# Altium PCB NRV-AOU34.PCBDOC
Units mil, origin at the board's own origin, x right, y up, seen from the top; angles counter-clockwise.
Board outline 6800 x 3400 mil, 2 copper layers (Top Layer, Bottom Layer), stack 61.8 mil thick; 27 components, 31 nets, 301 pads, 79 vias.
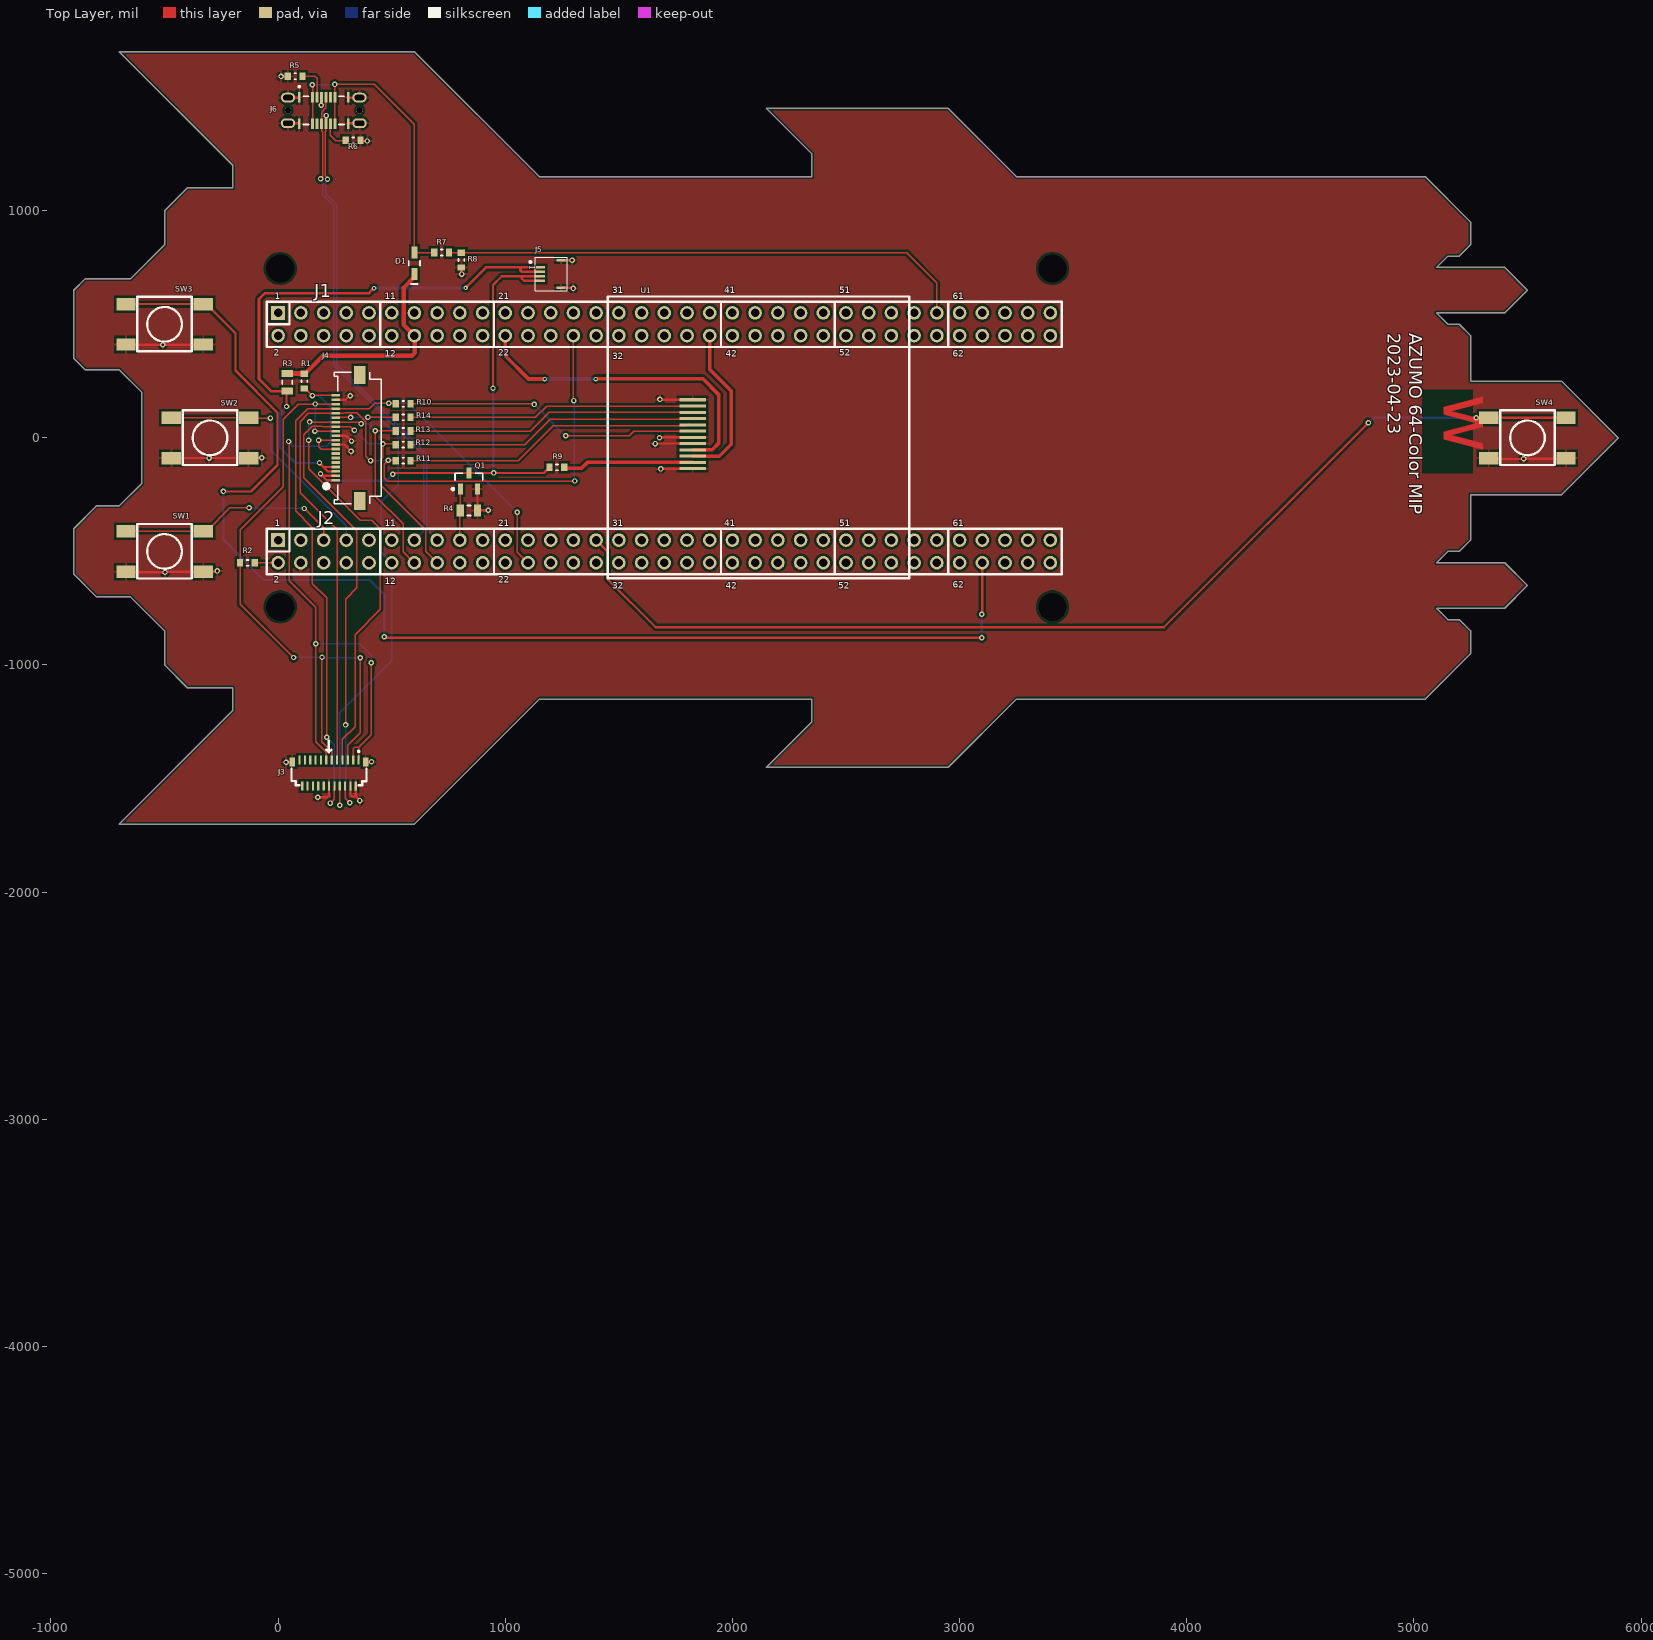
[diagram p0: Top Layer view]
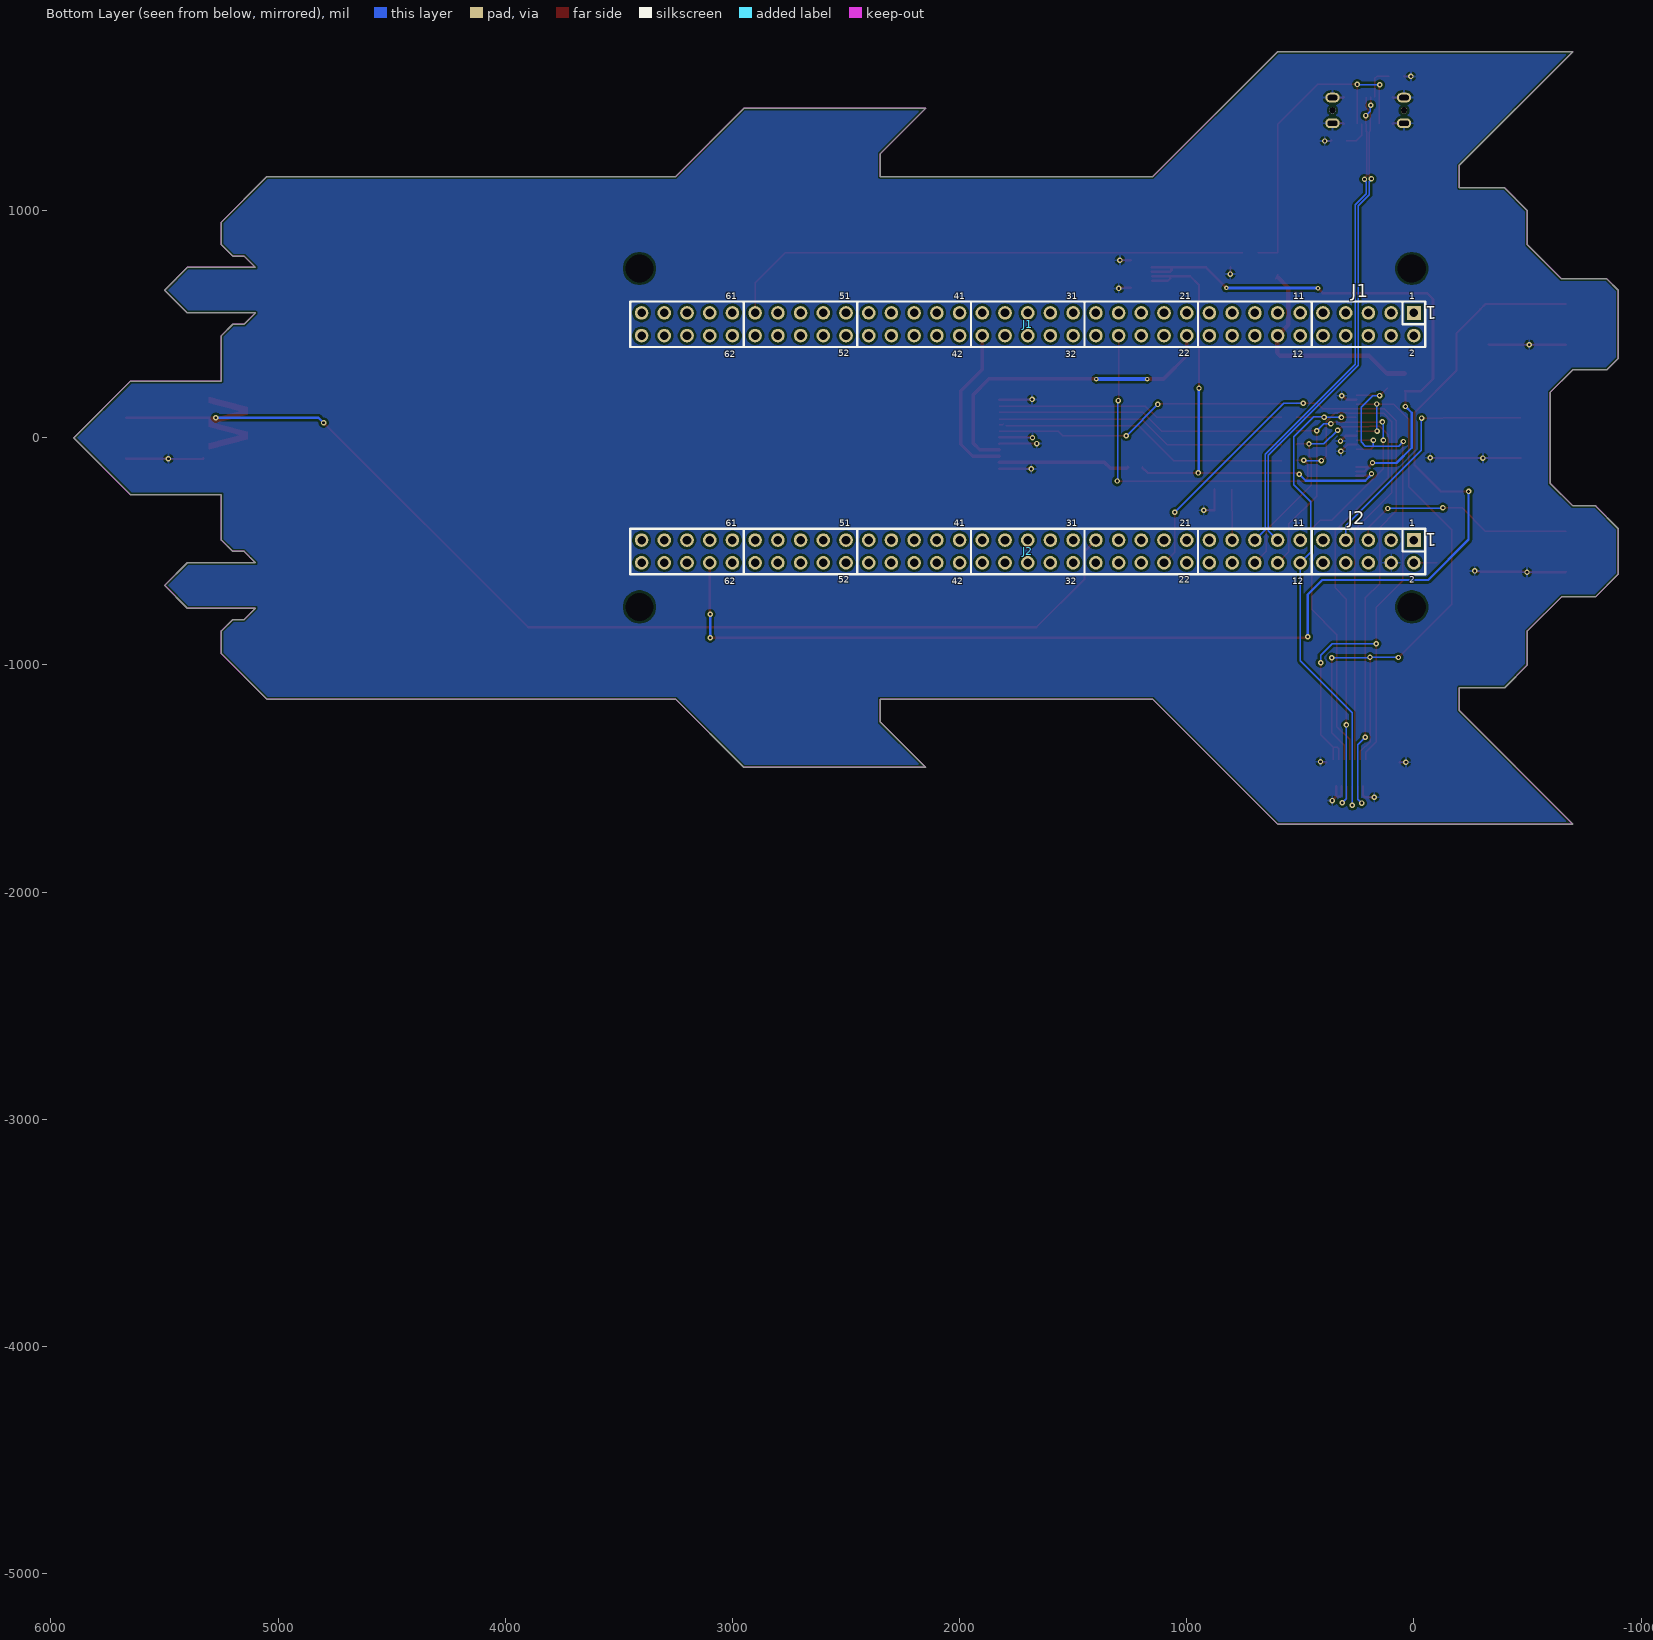
[diagram p1: Bottom Layer view, seen from below]
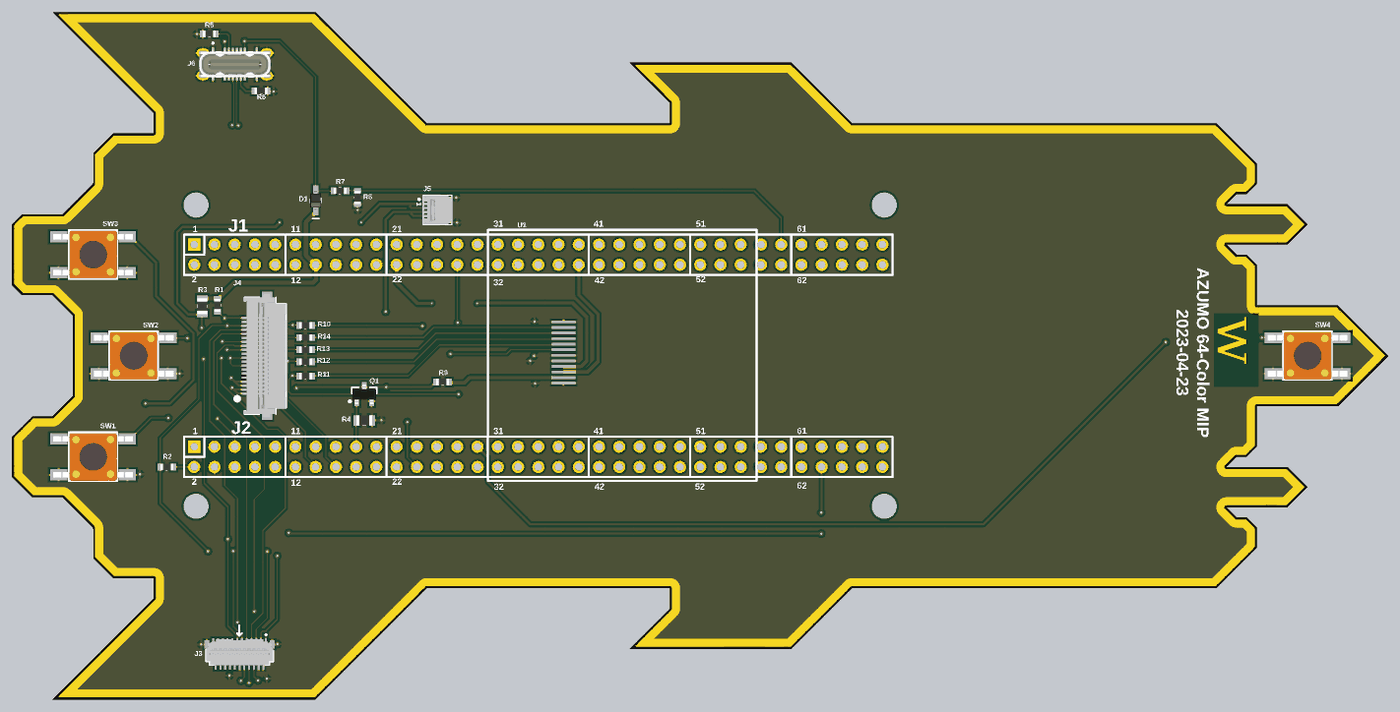
[diagram p2: 3D render of the assembled board from above, using the file's embedded part models]

## Layer stack, top to bottom
Top Solder: solder mask 0.4, Solder Resist, Dk 3.5
Top Layer: signal copper 1.4
Dielectric 3: core 59, Core-042, Dk 4.6
Bottom Layer: signal copper 1.4
Bottom Solder: solder mask 0.4, Solder Resist, Dk 3.5

## Board outline
-900,-600 -800,-700 -650,-700 -500,-850 -500,-1000 -400,-1100 -200,-1100 -200,-1200 -700,-1700 600,-1700 1150,-1150 2350,-1150 2350,-1250 2150,-1450 2950,-1450 3250,-1150 5050,-1150 5250,-950 5250,-850 5200,-800 5150,-800 5100,-750 5400,-750 5500,-650 5400,-550 5100,-550 5150,-500 5200,-500 5250,-450 5250,-250 5650,-250 5900,0 5650,250 5250,250 5250,450 5200,500 5150,500 5100,550 5400,550 5500,650 5400,750 5100,750 5150,800 5200,800 5250,850 5250,950 5050,1150 3250,1150 2950,1450 2150,1450 2350,1250 2350,1150 1150,1150 600,1700 -700,1700 -200,1200 -200,1100 -400,1100 -500,1000 -500,850 -650,700 -850,700 -900,650 -900,350 -850,300 -700,300 -600,200 -600,-200 -700,-300 -800,-300 -900,-400

## Design rules (kind name [scope] priority, off if disabled: settings)
Clearance [All] p1: gap=6 ignorepadtopadclearanceinfootprint=TRUE except(10: Arc-Poly Track-Poly SMDPad-Poly THPad-Poly Via-Poly Fill-Poly Poly-Poly)
ComponentClearance [All] p1: gap=0 collisioncheckmode=3 verticalgap=0 showdistances=FALSE
DiffPairsRouting [All] p1: maxlimit=6 minlimit=6 mostfreqgap=6 toplayer_minwidth=7 toplayer_maxwidth=7 toplayer_prefwidth=7 bottomlayer_minwidth=7 bottomlayer_maxwidth=7 bottomlayer_prefwidth=7 maxuncoupledlength=500
FabricationTestPointUsage TestPointUsage [All] p1: valid=0 allowmultiple=FALSE
FabricationTestpoint Testpoint [All] p1: side=3 testpointundercomponent=TRUE minsize=40 maxsize=100 preferedsize=60 minholesize=0 maxholesize=40 preferedholesize=32 testpointgrid=1 allowsidetop=TRUE allowsidebottom=TRUE usegrid=TRUE gridtolerance=0.01
HoleSize [All] p1: absolutevalues=TRUE maxlimit=500 minlimit=6 maxpercent=80.000 minpercent=20.000
HoleToHoleClearance [All] p1: gap=0 allowstackedmicrovias=TRUE
MinimumSolderMaskSliver [All] p1: minsoldermaskwidth=0
PlaneClearance [All] p1: clearance=12
PlaneConnect [All] p1: planeconnectstyle=Direct reliefexpansion=12 reliefentries=4 reliefconductorwidth=6 reliefairgap=6
PolygonConnect PolygonConnect_ThermalPad [HoleSize = 18;] p1: connectstyle=Direct reliefconductorwidth=10 reliefentries=4 polygonreliefangle="90 Angle" airgapwidth=10
PolygonConnect [All] p2: connectstyle=Relief reliefconductorwidth=10 reliefentries=4 polygonreliefangle="90 Angle" airgapwidth=10
RoutingVias [All] p1: holewidth=10 width=20 viastyle="Through Hole" minholewidth=6 minwidth=12 maxholewidth=20 maxwidth=50
ShortCircuit ShortCircuit_1 [HasFootprint('4-40 X 250') vs HasFootprint('4-40 X 250')] p1: allowed=TRUE
ShortCircuit [All] p2: allowed=FALSE
SilkToSilkClearance [All] p1: silktosilkclearance=0
SilkToSolderMaskClearance SilkscreenOverComponentPads [IsPad] p1: minsilkscreentomaskgap=1 clearancetoexposedcopper=TRUE
SolderMaskExpansion [All] p1: expansion=2.5 istentingtop=FALSE
Width [All] p1: maxlimit=200 minlimit=5 preferedwidth=6
18 further rules are at their usual default settings.

## Classes and differential pairs
pad class "New Class": U24-25

## Components (designator, comment, footprint, x,y, rotation, side; value= is the part's Value field where it differs from the comment)
D1 "BAT760-7" D_SOD-323_P 600,768 r270 top
J1 "HDR_2x35" "HEADER 2X35 .100\"" 0,550 r0 bottom
J2 "HDR_2x35" "HEADER 2X35 .100\"" 0,-450 r0 bottom
J3 "=Value" FH26W-23S-0.3SHW(60) 224,-1479 r180 top
J4 "505110-2091" CON_5051102091_MOL 350,0 r90 top
J5 "503480-0400" 5034800400 1199,721 r90 top
J6 "USB4145-03-0230-C" GCT_USB4145-03-0230-C_REVA2 200.79,1441.54 r0 top
Q1 "FDV305N" SOT-23 840,-190 r90 top
R1 "0" R0603_0.55MM_MD 115,250 r270 top value=1k
R2 "0" R0603_0.55MM_MD -135,-550 r180 top value=1k
R3 "100" R0805_0.65MM_MD 40,245 r90 top value=1k
R4 "100k" R0805_0.65MM_MD 840,-320 r0 top value=1k
R5 "5.1k" R0603_0.55MM_MD 75,1592 r180 top
R6 "5.1k" R0603_0.55MM_MD 330,1310 r0 top
R7 "5.1k" R0603_0.55MM_MD 720,816 r0 top
R8 "10k" R0603_0.55MM_MD 807,783 r90 top
R9 "33" R0603_0.55MM_MD 1227.52,-130 r0 top
R10 "0" R0603_0.55MM_MD 550,150 r0 top value=1k
R11 "0" R0603_0.55MM_MD 550,-100 r0 top value=1k
R12 "0" R0603_0.55MM_MD 550,-30 r0 top value=1k
R13 "0" R0603_0.55MM_MD 550,30 r0 top value=1k
R14 "0" R0603_0.55MM_MD 550,90 r0 top value=1k
SW1 "FSM4JSMATR" FSM4JSMA -500,-500 r90 top
SW2 "FSM4JSMATR" FSM4JSMA -300,0 r90 top
SW3 "FSM4JSMATR" FSM4JSMA -500,500 r90 top
SW4 "FSM4JSMATR" FSM4JSMA 5500,0 r90 top
U1 "ER-TFT1.54-1" ER-TFT1.54-1 1825,15.98 r270 top

## Footprints (in the part's own frame and the unit in brackets; to place one, negate y for a bottom-side part, rotate by r counter-clockwise, add the part's x,y. Pads: shape width x height; smd on the part's side, far side on the other; paste and mask are expansions set on the pad)
5034800400 [mm] "CONN FFC FPC 4POS 0.50MM R/A"
  rect 0.3x1.1 smd: 1(0.75,1.175) 2(0.25,1.175) 3(-0.25,1.175) 4(-0.75,1.175)
  rect 0.3x1 smd: M1(-1.54,-1.175) M2(1.54,-1.175)
  silkscreen extent -1.88,-1.88 1.88,2.37, body extent -1.85,-1.88 1.85,1.72, height 1.88
CON_5051102091_MOL [mm]
  rect 0.3x1 smd paste+0 mask+0.076: 1(-4.75,2.45) 2(-4.25,2.45) 3(-3.75,2.45) 4(-3.25,2.45) 5(-2.75,2.45) 6(-2.25,2.45) 7(-1.75,2.45) 8(-1.25,2.45) 9(-0.75,2.45) 10(-0.25,2.45) 11(0.25,2.45) 12(0.75,2.45) 13(1.25,2.45) 14(1.75,2.45) 15(2.25,2.45) 16(2.75,2.45) 17(3.25,2.45) 18(3.75,2.45) 19(4.25,2.45) 20(4.75,2.45)
  rect 2x1.3 smd paste+0 mask+0.076: P1(-7.05,-0.25) P2(7.05,-0.25)
  silkscreen extent -7.35,-2.65 7.35,3.72, body extent -7.75,-2.6 7.75,2.7, height 1.88
D_SOD-323_P [mm] "SOD-123 Diode - Polarized"
  rect 1.35x0.7 smd: 1(-1.2,0) 2(1.2,0)
  silkscreen extent -0.25,-0.64 2.29,0.64, body extent -1.3,-0.68 1.3,0.67, height 1.1
ER-TFT1.54-1 [mm]
  rect 0.35x3 smd: 1(3.85,0) 2(3.15,0) 3(2.45,0) 4(1.75,0) 5(1.05,0) 6(0.35,0) 7(-0.35,0) 8(-1.05,0) 9(-1.75,0) 10(-2.45,0) 11(-3.15,0) 12(-3.85,0)
  silkscreen extent -15.41,-9.5 16.11,24.22, body extent -15.54,-9.63 16.24,24.35, height 2.1
FH26W-23S-0.3SHW(60) [mm] "23 Position FPC Connector Contacts, Bottom 0.012\" (0.30mm) Surface Mount, Right Angle"
  rect 0.25x1 smd: 1(-3.3,-1.565) 2(-3,1.365) 3(-2.7,-1.565) 4(-2.4,1.365) 5(-2.1,-1.565) 6(-1.8,1.365) 7(-1.5,-1.565) 8(-1.2,1.365) 9(-0.9,-1.565) 10(-0.6,1.365) 11(-0.3,-1.565) 12(0,1.365) 13(0.3,-1.565) 14(0.6,1.365) 15(0.9,-1.565) 16(1.2,1.365) 17(1.5,-1.565) 18(1.8,1.365) 19(2.1,-1.565) 20(2.4,1.365) 21(2.7,-1.565) 22(3,1.365) 23(3.3,-1.565)
  rect 0.6x1 smd: MP1(-4.1,-1.3) MP2(4.1,-1.3)
  silkscreen extent -4.2,-3.7 4.2,1.28, body extent -4.2,-1.95 4.2,1.55, height 1
FSM4JSMA [mil] "SWITCH TACTILE SPST-NO 0.05A 12V"
  rect 55x85 smd: A(-89,170) A(-89,-170) B(89,170) B(89,-170)
  silkscreen extent -119,-120 121,120, body extent -118,-198 118,196, height 200
GCT_USB4145-03-0230-C_REVA2 [mm]
  rect 0.3x1.15 smd: A1(-2.75,1.485) A4(-1.25,1.485) A5(-0.75,1.485) A6(-0.25,1.485) A7(0.25,1.485) A8(0.75,1.485) A9(1.25,1.485) A12(2.75,1.485) B1(2.75,-1.485) B4(1.25,-1.485) B5(0.75,-1.485) B6(0.25,-1.485) B7(-0.25,-1.485) B8(-0.75,-1.485) B9(-1.25,-1.485) B12(-2.75,-1.485)
  oval 1.6x1.1 hole 0.6 slot 1.1 at 0 deg: S1(-4,1.43) S2(4,1.43) S3(-4,-1.43) S4(4,-1.43)
  round 0.71 hole 0.71 unplated: ""(-4,0) ""(4,0)
  silkscreen extent -2.85,-1.58 2.28,2.76, body extent -4.48,-1.86 4.47,1.83, height 7.46
"HEADER 2X35 .100\"" [mil]
  rect 62x62 hole 38: 1(0,0)
  round 60 hole 38: 2(0,100) 3(100,0) 4(100,100) 5(200,0) 6(200,100) 7(300,0) 8(300,100) 9(400,0) 10(400,100) 11(500,0) 12(500,100) 13(600,0) 14(600,100) 15(700,0) 16(700,100) 17(800,0) 18(800,100) 19(900,0) 20(900,100) 21(1000,0) 22(1000,100) 23(1100,0) 24(1100,100) 25(1200,0) 26(1200,100) 27(1300,0) 28(1300,100) 29(1400,0) 30(1400,100) 31(1500,0) 32(1500,100) 33(1600,0) 34(1600,100) 35(1700,0) 36(1700,100) 37(1800,0) 38(1800,100) 39(1900,0) 40(1900,100) 41(2000,0) 42(2000,100) 43(2100,0) 44(2100,100) 45(2200,0) 46(2200,100) 47(2300,0) 48(2300,100) 49(2400,0) 50(2400,100) 51(2500,0) 52(2500,100) 53(2600,0) 54(2600,100) 55(2700,0) 56(2700,100) 57(2800,0) 58(2800,100) 59(2900,0) 60(2900,100) 61(3000,0) 62(3000,100) 63(3100,0) 64(3100,100) 65(3200,0) 66(3200,100) 67(3300,0) 68(3300,100) 69(3400,0) 70(3400,100)
  silkscreen extent -50,-50 3450,150
R0603_0.55MM_MD [mm] "Resistor 0603 Medium Density"
  rect 0.7x0.85 smd: 1(-0.825,0) 2(0.825,0)
  silkscreen extent -0.1,-0.33 0.1,0.33, body extent -0.8,-0.4 0.8,0.4, height 0.55
R0805_0.65MM_MD [mm] "Resistor 0805 Medium Density"
  rect 0.8x1.3 smd: 1(-0.975,0) 2(0.975,0)
  silkscreen extent -0.2,-0.55 0.2,0.55, body extent -1,-0.63 1,0.63, height 0.65
SOT-23 [mm] "SOT-23"
  rect 1.2x0.6 smd: 1(-0.9,0.95) 2(-0.9,-0.95) 3(0.9,0)
  silkscreen extent -1.02,-1.55 0.87,1.92, body extent -1.27,-1.5 1.23,1.5, height 1.07

## Part data
D1: "DIODE SCHOTTKY 30V 1A SOD323", Capacitance @ Vr- F="25pF @ 5V- 1MHz", Current - Average Rectified (Io)=1A, Current - Reverse Leakage @ Vr="50µA @ 15V", Manufacturer="Diodes Inc", Package="SC-76- SOD-323", Supplier Device Package=SOD-323, Supplier Part Number 1=BAT760DICT-ND, Voltage - DC Reverse (Vr) (Max)=30V, Voltage - Forward (Vf) (Max) @ If="550mV @ 1A", Category=Diodes, CategorySort=400, ComponentLink1Description="Internal Datasheet", ComponentLink1URL=http://www.diodes.com/datasheets/ds30498.pdf, ComponentLink2Description="External Datasheet", ComponentLink2URL=http://www.diodes.com/datasheets/ds30498.pdf, Diode Suffix=1A_2C, Diode Type=Schottky, Manufacturer Part Number=BAT760-7, Mounting Type="Surface Mount", Num Pins=2, Packaging="Cut Tape (CT)", Reverse Recovery Time (trr)=-, SortValue=BAT760-7, Speed="Fast Recovery =< 500ns- > 200mA (Io)", Supplier 1=Digi-Key
J1 J2: "2x35 Header .100\"", Supplier Part Number 1=1849-PR20204VBDN-ND, Pricing="1=0.16000, 10=0.15400, 100=0.09510, 500=0.07872, 1000=0.06888, 5000=0.05904, 10000=0.05740 (USD)", RoHS=No, Stock=3387, Supplier 1=Digi-Key
J3: library part FH26W-23S-0.3SHW(60), Manufacturer=Hirose, Manufacturer Part Number=FH26W-23S-0.3SHW(60)
J4: "Conn, Rect, Rt. Angle, FFC/FPC, 0.50MM Pitch, 20 Circuit, Bottom Contact, ZIF", Actuator Color=Black, Current Rating=500mA, Flammability Rating="UL94 V-0", Housing Color=Beige, Manufacturer=Molex, Max Operating Temperature=105°C, Min Operating Temperature=-40°C, Supplier Part Number 1=538-505110-2091, Voltage Rating=50V, Actuator Material=Nylon,Glass,Polyamide, Category="FFC / FPC", ComponentLink1Description=http://www.farnell.com/datasheets/2790613.pdf?src-supplier=Farnell, ComponentLink1URL=http://www.farnell.com/datasheets/2790613.pdf?src-supplier=Farnell, ComponentLink2Description=https://media.digikey.com/pdf/Data%20Sheets/Molex%20PDFs/FFC-FPC_Connectors.pdf?src-supplier=Digi-Key, ComponentLink2URL=https://media.digikey.com/pdf/Data%20Sheets/Molex%20PDFs/FFC-FPC_Connectors.pdf?src-supplier=Digi-Key, ComponentLink3Description=http://www.alliedelec.com/images/products/datasheets/bm/MOLEX/70606838.pdf?src-supplier=Allied+Electronics, ComponentLink3URL=http://www.alliedelec.com/images/products/datasheets/bm/MOLEX/70606838.pdf?src-supplier=Allied+Electronics, ComponentLink4Description=http://www.molex.com/pdm_docs/sd/5051102091_sd.pdf?src-supplier=Avnet, ComponentLink4URL=http://www.molex.com/pdm_docs/sd/5051102091_sd.pdf?src-supplier=Avnet, ComponentLink5Description=http://www.farnell.com/datasheets/2790613.pdf?src-supplier=Element14, ComponentLink5URL=http://www.farnell.com/datasheets/2790613.pdf?src-supplier=Element14, ComponentLink6Description=http://www.farnell.com/datasheets/2790613.pdf?src-supplier=Newark, ComponentLink6URL=http://www.farnell.com/datasheets/2790613.pdf?src-supplier=Newark, Contact Material=Bronze, Contact Plating=Gold, Gender=Receptacle, Halogen Free="Low Halogen", Height=1.9mm, Housing Material=Polymer, Manufacturer Part Number=505110-2091, Mating Cycles=25, Mounting Technology="Surface Mount", Number of Circuits=20, Number of Contacts=20, Number of Positions=20, Number of Rows=1, Orientation="Right Angle", Packaging="Cut Tape", Pins=20, Pitch=0.5mm, Pricing="1=0.95000, 10=0.78000, 50=0.78000, 100=0.65000, 500=0.58500, 1000=0.52000, 3000=0.47100, 6000=0.43200, 9000=0.42200, 10000=0.42200, 24000=0.40600 (USD)", Reach SVHC Compliant=Unknown, RoHS=Yes, Series="Easy-On 505110", Stock 1=37659, Supplier 1=Mouser, Termination=Solder
J5: "CONN FFC FPC 4POS 0.50MM R/A", Current Rating=500mA, Flammability Rating="UL94 V-0", Housing Color=White, Manufacturer=Molex, Max Operating Temperature=85°C, Max Voltage Rating (AC)=50V, Min Operating Temperature=-40°C, Package Quantity=1, Supplier Part Number 1=WM1386CT-ND, Actuator Material=Nylon,Glass,Polyamide, ComponentLink1Description=https://datasheet.ciiva.com/671/5034800400-sd-671136.pdf?src-supplier=Digi-Key, ComponentLink1URL=https://datasheet.ciiva.com/671/5034800400-sd-671136.pdf?src-supplier=Digi-Key, ComponentLink2Description=https://datasheet.ciiva.com/15249/392825034800400-ffc-fpc-nectors-15249120.pdf?src-supplier=Arrow+Europe, ComponentLink2URL=https://datasheet.ciiva.com/15249/392825034800400-ffc-fpc-nectors-15249120.pdf?src-supplier=Arrow+Europe, ComponentLink3Description=https://datasheet.ciiva.com/16658/5034800400-ffc-fpc-connectors-16658883.pdf?src-supplier=Avnet+Europe, ComponentLink3URL=https://datasheet.ciiva.com/16658/5034800400-ffc-fpc-connectors-16658883.pdf?src-supplier=Avnet+Europe, ComponentLink4Description=https://datasheet.ciiva.com/3926/135095034800400-ffc-fpc-nectors-3926214.pdf?src-supplier=Arrow, ComponentLink4URL=https://datasheet.ciiva.com/3926/135095034800400-ffc-fpc-nectors-3926214.pdf?src-supplier=Arrow, ComponentLink5Description=https://datasheet.ciiva.com/5137/5034800400-ffc-fpc-connectors-179546-5137607.pdf?src-supplier=Mouser, ComponentLink5URL=https://datasheet.ciiva.com/5137/5034800400-ffc-fpc-connectors-179546-5137607.pdf?src-supplier=Mouser, ComponentLink6Description=https://datasheet.ciiva.com/671/5034800400-sd-671137.pdf?src-supplier=Digi-Key, ComponentLink6URL=https://datasheet.ciiva.com/671/5034800400-sd-671137.pdf?src-supplier=Digi-Key, ComponentLink7Description=https://datasheet.ciiva.com/10366/5034800400-ffc-fpc-connectors-10366566.pdf?src-supplier=Avnet, ComponentLink7URL=https://datasheet.ciiva.com/10366/5034800400-ffc-fpc-connectors-10366566.pdf?src-supplier=Avnet, ComponentLink8Description=https://datasheet.ciiva.com/671/5034800400-sd-671138.pdf?src-supplier=Digi-Key, ComponentLink8URL=https://datasheet.ciiva.com/671/5034800400-sd-671138.pdf?src-supplier=Digi-Key, Contact Material=Bronze, Contact Plating=Gold, Depth=4mm, ELV=Compliant, Gender=Female, Halogen Free="Low Halogen", Housing Material=Polymer, Length=3.7mm, Manufacturer Part Number=503480-0400, Material=Bronze, Mating Cycles=10, Max Voltage Rating (DC)=50V, Number of Circuits=4, Number of Contacts=4, Number of Positions=4, Number of Rows=1, Orientation="Right Angle", Packaging="Tape and Reel", Pitch=0.5mm, Pricing="1=0.7, 10=0.652, 25=0.5864, 50=0.5214, 100=0.4997, 250=0.4562, 500=0.4345, 1000=0.3585 (USD)", Radiation Hardening=No, REACH SVHC="No SVHC", RoHS=Yes, Stackable=No, Stock=3204, Supplier 1=Digi-Key, Termination=Solder, Voltage Rating=50V, Voltage Rating (AC)=50V, Wire/Cable Type=Straight
J6: "USB Connectors USB-C Rec 3u\" Vert 16P SMT 2.3mm TH stakes H7.46mm T+R+Cap", Manufacturer=GCT, Package=None, Availability=Unavailable, Manufacturer Part Number=USB4145-03-0230-C, Price=None
Q1: library part FDV305, "MOSFET N-CH 20V 0.9A SOT-23", Manufacturer="Fairchild Semiconductor", Source Part Number=FDV305NCT-ND, Manufacturer Part Number=FDV305N, Source=Digikey
R1 R2 R10 R11 R12 R13 R14: library part R, ComponentLink1Description=http://industrial.panasonic.com/www-cgi/jvcr13pz.cgi?E+PZ+3+AOA0002+ERJ3EKF10R0V+7+WW, ComponentLink1URL=http://industrial.panasonic.com/www-cgi/jvcr13pz.cgi?E+PZ+3+AOA0002+ERJ3EKF10R0V+7+WW
R3 R4 R5 R6 R7 R8 R9: library part R, "0", ComponentLink1Description=http://industrial.panasonic.com/www-cgi/jvcr13pz.cgi?E+PZ+3+AOA0002+ERJ3EKF10R0V+7+WW, ComponentLink1URL=http://industrial.panasonic.com/www-cgi/jvcr13pz.cgi?E+PZ+3+AOA0002+ERJ3EKF10R0V+7+WW
SW1 SW2 SW3 SW4: "SWITCH TACTILE SPST-NO 0.05A 12V", Contact Rating @ Voltage="0.05A @ 12VDC", Manufacturer="TE Connectivity", Operating Force=160gf, Supplier Part Number 1=450-1759-1-ND, Actuator Orientation="Top Actuated", Actuator Type=Standard, Category=Switches, Circuit=SPST-NO, ComponentLink1Description=http://documents.tycoelectronics.com/commerce/DocumentDelivery/DDEController?Action=srchrtrv&DocNm=2-1437565-7&DocType=CD&DocLang=EN, ComponentLink1URL=http://documents.tycoelectronics.com/commerce/DocumentDelivery/DDEController?Action=srchrtrv&DocNm=2-1437565-7&DocType=CD&DocLang=EN, Illumination=Non-Illuminated, Manufacturer Part Number=FSM4JSMATR, Mounting Type="Surface Mount", Outline="6.00mm x 6.00mm", Packaging="Cut Tape (CT)", Pricing 1="1=0.36, 10=0.34, 25=0.2912, 50=0.2474, 100=0.2377, 250=0.21344, 500=0.20374 (USD)", RoHS="RoHS Compliant", Stock 1=35617, Supplier 1=Digi-Key, Switch Function=Off-Mom, Termination Style="Gull Wing"
U1: "1.54\" 240x240 IPS Display", Manufacturer="Buy Display", Manufacturer Part Number=ER-TFT1.54-1

## Free pads (board coordinates)
  round 0 hole 125 unplated: 1(9,-744.5) 1(9,745.5) 1(3409,-744.5) 1(3409,745.5)
  round 10 on Mech16: 1(346.14,-1903.09) 1(346.14,-1901.73) 1(346.14,-903.09) 1(346.14,-901.73) 1(445.14,-3777.59) 1(445.14,-2777.59) 1(2096.14,-403.09) 1(2096.14,-401.73) 1(2195.14,-2277.59) 1(2596.14,-403.09) 1(2596.14,-401.73) 1(2695.14,-2277.59) 1(3044.98,-3191.04) 1(3044.98,-3189.68) 1(3143.98,-5065.54) 1(4346.14,-1903.09) 1(4346.14,-1901.73) 1(4346.14,-903.09) 1(4346.14,-901.73) 1(4445.14,-3777.59) 1(4445.14,-2777.59)

## Via types
v1: diameter 24, hole 12, Top Layer to Bottom Layer, tented both sides, 75 vias
v2: diameter 20, hole 10, Top Layer to Bottom Layer, tented both sides, 4 vias

## Nets (pads, with @x,y where several pads share a name; then routed paths per layer and width w, separated by ;. In a path a pad name is that pad's centre, name@x,y a point inside that pad or via, vN(x,y) a via of type N, cw(c..) or ccw(c..) an arc to the next point about the centre after c; other vN are vias at no path point)
AOU_3v3: J3.5 J3.11 J4.12 J4.18 R2.2 | length 2931.2
  Top Layer w6: v1(68,-967) -167.48,-731.52 R2.2 -167.48,-405.48 23,-215 23,83 89,149 v1(162.87,149) 163.87,148 253.18,148 J4.18 ; v1(162,30) 162.47,29.53 J4.12 ; v1(193,-966) 193,-1338 235.81,-1380.81 J3.11 ; J3.5 306.68,-1352.32 361,-1298 v1(361,-968)
  Bottom Layer w6: v1(68,-967) 68.5,-966.5 192.5,-966.5 v1(193,-966) 194,-967 360,-967 v1(361,-968) ; v1(162,30) 162.44,30.44 162.44,148.56 v1(162.87,149)
AOU_5v: J3.1 J3.3 J3.13 J4.8 J4.10 J4.20 R1.2 | length 3112.7
  Top Layer w6: v1(46,-16) 50,-20 50,-630 166,-746 v1(166,-907) 166,-1337 212.19,-1383.19 J3.13 ; R1.2 117.95,217.52 149.47,186 v1(151,186) 152.01,187.01 J4.20 ; J4.8 190.21,-49.21 179.35,-38.35 179.35,-12.35 v1(178,-11) 178.58,-10.42 252.96,-10.42 J4.10 ; J3.3 330.3,-1369.7 338,-1362 353.84,-1362 353.92,-1362.08 ; J3.1 353.92,-1362.08 ; v1(410,-990) 410,-1306 353.92,-1362.08
  Bottom Layer w6: v1(46,-16) 67,-37 176.78,-37 ; v1(151,186) 181,186 232,135 232,-18 213,-37 179,-37 176.78,-37 ; v1(166,-907) 359,-907 410,-958 v1(410,-990) ; v1@179,-10 179,-34.78 176.78,-37
BL_CTRL: J2.17 Q1.1 R4.1 | length 225.6
  Top Layer w6: J2.17 800,-321.61 R4.1 802.6,-319.02 Q1.1
GND: J2.4 J3.2 J3.4 J3.12 J3.MP1 J3.MP2 J4.9 J4.11 J4.19 J5.M1 J5.M2 J6.A1 J6.A12 J6.B1 J6.B12 J6.S1 J6.S2 J6.S3 J6.S4 Q1.2 R4.2 R5.2 R6.2 R8.1 SW1.A SW2.A SW3.A SW4.A U1.1 U1.5 U1.6 U1.12 | length 3146.9
  Top Layer w10: SW1.A@-670,-589 -667,-592 v1(-498,-592) -495,-589 -330,-589 -273,-589 -270,-586 v1(-268,-586) ; SW3.A@-670,411 -669,410 -331,410 SW3.A@-330,411 ; SW2.A@-470,-89 v1(-304,-89) -130,-89 -73,-89 v1(-72,-88) ; v1(13,1591) 41.52,1591 R5.2 ; v1(35,-1428) 35.18,-1427.82 J3.MP2 ; J6.S3 91.61,1385.24 92.52,1384.33 J6.B12 ; J6.S1 91.61,1497.83 92.52,1498.74 J6.A1 ; v1(174,-1582) 216,-1582 224,-1574 J3.12 ; J4.9 291.53,-29.53 v1(321,-59) ; J4.11 299.16,9.84 v1(323,-14) ; J4.19 296.49,167.32 314.17,185 v1(317,185) ; J6.B1 309.06,1384.33 309.96,1385.24 J6.S4 ; J6.A12 309.06,1498.74 309.96,1497.83 J6.S2 ; J3.4 318.49,-1573.23 324.35,-1579.09 342.11,-1579.09 J3.2 ; 343.09,-1579.09 359,-1595 v1(359,-1597) ; R6.2 365.48,1307 v1(392,1307) ; J3.MP1 409.18,-1427.82 v1(411,-1426) ; R8.1 807,722 v1(808,721) ; Q1.2 877.4,-319.02 R4.2 879.39,-319 v1(925,-319) ; J5.M1 1296.63,660.37 v1(1299,658) ; J5.M2 1284.63,781.63 1285.36,782.36 1293.64,782.36 v1(1294,782) ; v1(1660,-25) 1660.18,-25.18 1824.82,-25.18 U1.5 ; v1(1679,0) 1681.2,2.2 U1.6 ; v1(1681,169) 1682.44,167.56 U1.12 ; v1(1684,-137) 1685.41,-135.59 U1.1 ; SW4.A@5330,-89 5330,-93 5483,-93 v1(5483,-92) 5670,-92 SW4.A@5670,-89
  other v1: -508,410
LCD_CS: J1.28 J3.9 J4.16 R11.1 | length 3745.5
  Top Layer w6: J3.9 259.43,-404.43 97,-242 97,72 133.27,108.27 J4.16 289.68,108.27 292.42,111 345.7,111 386,70.7 386,-82 404,-100 v1(407,-100) ; R11.1 515.52,-98 v1(485,-98) 466.57,-116.43 466.57,-176.57 480,-190 v1(1306,-190) ; J1.28 1300,166 v1(1302,164)
  Bottom Layer w6: v1(407,-100) 483,-100 v1(485,-98) ; v1(1302,164) 1304,162 1304,-188 v1(1306,-190)
LCD_DISP: J2.12 J3.8 J4.15 R14.1 | length 2288
  Top Layer w6: J4.15 255.05,90.09 318.91,90.09 v1(319,90) ; v1(271,-1618) 271.12,-1617.88 271.12,-1532.86 J3.8 ; v1(395.2,91.2) 516.32,91.2 R14.1
  Bottom Layer w6: v1(271,-1618) 271,-1211 500,-982 J2.12 453,-503 453,-282 528,-207 528,4 440,92 396,92 395,91 320,91 v1(319,90)
LCD_EXTCOM: J2.24 J3.10 J4.17 R10.1 | length 3322.6
  Top Layer w6: v1(214,-1318) 214,-705 151,-642 151,-396 77,-322 77,75 129.95,127.95 J4.17 401.95,127.95 426,152 515.52,152 R10.1 ; v1(230,-1608) 247.62,-1590.38 J3.10 ; v1(1053,-328) 1053,-503 J2.24
  Bottom Layer w6: v1(214,-1318) 247,-1351 247,-1591 v1(230,-1608) ; v1(487,152) 573,152 v1(1053,-328)
LCD_MOSI: J2.14 J3.7 J4.14 R13.1 | length 2767.4
  Top Layer w6: v1(134,-11) 134,-135.87 361.13,-363 412,-363 450,-401 450,-755 339,-866 339,-1272 283.06,-1327.94 J3.7 ; v1(138.42,69.96) 139.43,68.95 253.49,68.95 J4.14 353.23,68.9 360.13,62 v1(365,62) ; R13.1 515.52,32 431.51,32 428,28.49 428,-257 550,-379 550,-502 598,-550 J2.14
  Bottom Layer w6: v1(134,-11) 134,60.67 138.42,65.09 v1(138.42,69.96) ; v1(365,62) 397,62 v1(428,31)
LCD_SCK: J2.16 J3.6 J4.13 R12.1 | length 2909.9
  Top Layer w6: J3.6 294.87,-1585.87 v1(315,-1606) ; v1(297,-1264) 297,-710 346,-661 346,-408 113,-175 113,14 151,52 195.1,52 197.89,49.21 J4.13 254.09,48.66 317.72,48.66 333.38,33 v1(336,33) ; R12.1 514.31,-26.79 v1(461.58,-26.79) 461.58,-84.82 452.09,-94.31 452.09,-209.09 650,-407 650,-500 J2.16
  Bottom Layer w6: v1(297,-1264) 297,-1588 v1(315,-1606) ; v1(336,33) 395.79,-26.79 v1(461.58,-26.79)
LED+: J4.3 J4.4 J5.1 J5.2 R3.1 | length 2497.8
  Top Layer w10: v1(37,138) 37,203.61 R3.1 ; v1(182,-110) 182,-110.78 199.17,-127.95 ; J4.3 218.86,-147.64 199.17,-127.95 ; J4.4 199.17,-127.95
  Top Layer w12: R3.1@37,203.61 35.61,205 -29,205 -84,260 -84,611 -58,637 400,637 v2(422,659) ; v2(825,660) 915.53,750.53 1067,750.53 ; J5.2 1074.03,730.84 1067,737.87 1067,750.53 ; J5.1 1067,750.53
  Bottom Layer w10: v1(37,138) 9,110 9,-44 76,-111 181,-111 v1(182,-110)
  Bottom Layer w12: v2(422,659) 423,660 v2(825,660)
LED-: J4.1 J4.2 J5.3 J5.4 Q1.3 R9.1 | length 2335.1
  Top Layer w10: v1(186.41,-158.59) 194.93,-167.1 ; J4.1 214.4,-187.01 194.71,-167.32 J4.2 ; v1(505,-160) 508.79,-160 514.22,-154.57 Q1.3 v1(949,-154.57) 1170.47,-154.57 1183.31,-141.73 1186.26,-141.73 1195.04,-132.95 R9.1 ; v1(946,218) 946,673 984.16,711.16 1072,711.16 ; J5.4@1136.09,692.38 J5.4@1136.99,691.47 ; J5.3@1136.09,710.25 J5.3@1136.99,711.16 ; J5.4 J5.4@1136.99,691.47 ; J5.3 J5.3@1136.99,711.16 ; 1072,711.16 J5.3@1136.99,711.16 ; 1072,711.16 1072,702 1082.53,691.47 J5.4@1136.99,691.47
  Bottom Layer w10: v1(186.41,-158.59) 186.41,-161.41 214,-189 476,-189 v1(505,-160) ; v1(946,218) 947.5,216.5 947.5,-153.07 v1(949,-154.57)
NetJ2_5: J2.5 SW1.B | length 1003.1
  Top Layer w6: SW1.B@-670,-411 -330,-411 -315,-411 -212,-308 v1(-128,-308) ; v1(115,-311) 200,-396 J2.5
  Bottom Layer w6: v1(-128,-308) -125,-311 v1(115,-311)
NetJ2_7: J2.7 SW2.B | length 1112.2
  Top Layer w6: SW2.B@-470,89 -130,89 -128,87 v1(-34,87)
  Bottom Layer w6: v1(-34,87) -33,86 -33,-55 300,-388 J2.7
NetJ2_29: J2.29 SW4.B | length 4882.8
  Top Layer w10: J2.29 1450,-500 1450,-622 1662,-834 3899,-834 v1(4800,67) ; v1(5274.22,89) SW4.B@5670,89
  Bottom Layer w10: v1(4800,67) 4822,89 v1(5274.22,89)
NetJ2_64: J2.64 SW3.B | length 5649
  Top Layer w10: SW3.B@-670,589 -315,589 -292.5,566.5 -292.5,565.5 -188,461 -188,296 -3,111 -3,-120 -119,-236 v1(-241,-236) ; v1(467,-876) 471,-880 v1(3098,-880) ; v1(3098,-776) 3100,-774 J2.64
  Bottom Layer w10: v1(-241,-236) -241,-448 -63,-626 403,-626 467,-690 v1(467,-876) ; v1(3098,-880) v1(3098,-776)
NetJ6_A5: J6.A5 R5.1 | length 150.4
  Top Layer w6: R5.1 162,1592 171.26,1582.74 J6.A5
NetJ6_B5: J6.B5 R6.1 | length 128.4
  Top Layer w6: J6.B5 230.31,1331.68 253,1309 296.52,1309 R6.1
NetR9_2: R9.2 U1.2 | length 577.4
  Top Layer w16: R9.2 1264,-134 1336,-134 1361.97,-108.03 U1.2
NetR10_2: R10.2 U1.7 | length 1310.4
  Top Layer w6: R10.2 1124,150 v1(1127,147) ; v1(1266,9) 1545,9 1565.76,29.76 U1.7
  Bottom Layer w6: v1(1127,147) 1260,14 1262.49,14 1266,10.49 v1(1266,9)
NetR11_2: R11.2 U1.8 | length 1296.9
  Top Layer w6: R11.2 1057,-100 1211,54 U1.8@1796,54 ; U1.8@1807,61.21 1810.89,57.32 U1.8
NetR12_2: R12.2 U1.9 | length 1290.1
  Top Layer w6: R12.2 1085,-30 1197,82 1822.12,82 U1.9
NetR13_2: R13.2 U1.10 | length 1276.7
  Top Layer w6: R13.2 1111,30 1193.44,112.44 U1.10
NetR14_2: R14.2 U1.11 | length 1263.2
  Top Layer w6: R14.2 1132,90 1182,140 U1.11
P4_12__USB0_VBUS_DET: J1.59 R7.2 R8.2 | length 2335
  Top Layer w6: R7.2 806.48,816 R8.2 2766.52,815.48 2900,682 J1.59
USB0_DM: J2.13 J6.A7 J6.B7 | length 2169.9
  Top Layer w6: v1(186.96,1140.14) 186.96,1143.62 196,1152.66 196,1346 190.94,1351.06 J6.B7 190.94,1434.07 210.63,1453.76 J6.A7
  Bottom Layer w6: v1(186.96,1140.14) 186.96,1136.66 196,1127.63 196,1070.03 245,1021.03 245,320.03 642,-76.97 642,-408 J2.13
USB0_DP: J2.15 J6.A6 J6.B6 | length 2172.8
  Top Layer w6: v1(189.63,1464.38) 190.29,1465.03 190.29,1499.34 J6.A6 ; v1(211.94,1418.69) 211.29,1418.04 211.29,1383.73 J6.B6 210.63,1349.63 208,1347 208,1153.14 217.39,1143.75 v1(217.39,1138.88) v1@216.92,1139.35
  Bottom Layer w6: v1(189.63,1464.38) 192.13,1461.87 192.13,1438.51 v1(211.94,1418.69) ; v1(217.39,1138.88) 217.39,1134.75 209,1126.37 209,1074 257,1026 257,325 654,-72 654,-404 J2.15
USB0_VBUS: D1.1 J6.A4 J6.A9 J6.B4 J6.B9 R7.1 | length 1521.2
  Top Layer w6: v1(150,1554) 151.57,1552.43 J6.A4 J6.B9 ; J6.B4 J6.A9 250,1510.5 249.5,1511 249.5,1555.5 v1(249,1556) 424,1556 600,1380 D1.1 600.76,816 R7.1
  Bottom Layer w6: v1(150,1554) 247,1554 v1(249,1556)
USB_VBUS: D1.2 J1.14 R1.1 R3.2 | length 1001.6
  Top Layer w6: R1.1@114.09,283.39 R1.1 ; D1.2 600,707.96 D1.2@610.78,697.18
  Top Layer w20: R3.2 R1.1@114.09,283.39 ; R1.1 117.95,282.48 197.47,362 589.28,362 601,373.72 601,449 J1.14 552,498 552,659.96 D1.2@600,707.96
USB_VBUS2: J1.40 U1.3 | length 709.1
  Top Layer w16: U1.3 1942.53,-80.47 1995,-28 1995,206 1900,301 J1.40
VDD: J2.2 R2.1 | length 102.5
  Top Layer w6: R2.1 J2.2
VDD2: J1.22 U1.4 | length 1441.6
  Top Layer w16: J1.22 1000,361 1102,259 v2(1174,259) ; v2(1398,259) 1400,261 1869,261 1939,191 1939,-25 1911.09,-52.91 U1.4
  Bottom Layer w16: v2(1174,259) v2(1398,259)
pads on no net: J1.1 J1.2 J1.3 J1.4 J1.5 J1.6 J1.7 J1.8 J1.9 J1.10 J1.11 J1.12 J1.13 J1.15 J1.16 J1.17 J1.18 J1.19 J1.20 J1.21 J1.23 J1.24 J1.25 J1.26 J1.27 J1.29 J1.30 J1.31 J1.32 J1.33 J1.34 J1.35 J1.36 J1.37 J1.38 J1.39 J1.41 J1.42 J1.43 J1.44 J1.45 J1.46 J1.47 J1.48 J1.49 J1.50 J1.51 J1.52 J1.53 J1.54 J1.55 J1.56 J1.57 J1.58 J1.60 J1.61 J1.62 J1.63 J1.64 J1.65 J1.66 J1.67 J1.68 J1.69 J1.70 J2.1 J2.3 J2.6 J2.8 J2.9 J2.10 J2.11 J2.18 J2.19 J2.20 J2.21 J2.22 J2.23 J2.25 J2.26 J2.27 J2.28 J2.30 J2.31 J2.32 J2.33 J2.34 J2.35 J2.36 J2.37 J2.38 J2.39 J2.40 J2.41 J2.42 J2.43 J2.44 J2.45 J2.46 J2.47 J2.48 J2.49 J2.50 J2.51 J2.52 J2.53 J2.54 J2.55 J2.56 J2.57 J2.58 J2.59 J2.60 J2.61 J2.62 J2.63 J2.65 J2.66 J2.67 J2.68 J2.69 J2.70 J3.14 J3.15 J3.16 J3.17 J3.18 J3.19 J3.20 J3.21 J3.22 J3.23 J4.5 J4.6 J4.7 J4.P1 J4.P2 J6. J6.A8 J6.B8

## Polygon pours and split planes (outlines as drawn)
GND on Bottom Layer "GND_L02_P000" (solid, remove dead copper, pour order 0): -1100,1840 -1100,-2324 6318,-2324 6318,1840
GND on Top Layer "GND_L01_P001" (solid, remove dead copper, pour order 1): -1106,1862 -1106,-2294 6309,-2294 6309,1868 -1107,1868

## Keep-outs
Keep-Out Layer:
  the board outline again, w1

## Other copper
Top Layer:
  text "w" at 5054,195 h400 r270

## Silkscreen, mask and mechanical layers (free items; w line width, h text height)
Top Overlay:
  lines w10: -49.7,-500.43 50,-500.43 50,-400.6 ; -49.7,499.57 50,499.57 50,599.4 ; 50,599.5 50.04,599.5 ; 450,-599.4 450,-400 ; 450,400 450,599.4 ; 950,-599.4 950,-400 ; 950,400 950,599.4 ; 1450,-599.4 1450,-400 ; 1450,400.6 1450,600 ; 1950,-599.4 1950,-400 ; 1950,400.6 1950,600 ; 2450,-599.4 2450,-400 ; 2450,400.6 2450,600 ; 2950,-599.4 2950,-400 ; 2950,400.6 2950,600 ; -50,-600.5 -50,-400.5 3450,-400.5 3450,-600.5 -50,-600.5 ; -50,399.5 3450,399.5 3450,599.5 -50,599.5 -50,399.5
  text "31" at 1470,625 h50
  text "41" at 1965,625 h50
  text "51" at 2470,625 h50
  text "1" at -15,600 h50
  text "J1" at 160,600 h100
  text "11" at 470,600 h50
  text "21" at 970,600 h50
  text "61" at 2970,600 h50
  text "AZUMO 64-Color MIP  / 2023-04-23" at 4865,460 h95 r270
  text "2" at -20,350 h50
  text "22" at 970,350 h50
  text "52" at 2470,350 h50
  text "12" at 470,345 h50
  text "42" at 1970,345 h50
  text "62" at 2970,345 h50
  text "32" at 1470,335 h50
  text "1" at -15,-399.79 h50
  text "11" at 470,-399.79 h50
  text "21" at 970,-399.79 h50
  text "41" at 1965,-399.79 h50
  text "61" at 2970,-399.79 h50
  text "J2" at 175,-400.5 h100
  text "31" at 1470,-400.39 h50
  text "51" at 2470,-400.29 h50
  text "2" at -20,-649.79 h50
  text "22" at 970,-649.79 h50
  text "12" at 470,-654.79 h50
  text "62" at 2970,-670 h50
  text "42" at 1970,-675 h50
  text "52" at 2466,-675 h50
  text "32" at 1472,-676 h50
Bottom Overlay:
  lines w10: 450,-600 450,-400 ; 450,400 450,600 ; 950,-600 950,-400 ; 950,400 950,600 ; 1450,-600 1450,-400 ; 1450,400 1450,600 ; 1950,-600 1950,-400 ; 1950,400 1950,600 ; 2450,400 2450,600 ; 2950,400 2950,600 ; 2450,-600 2450,-400 2450,-600 ; 2950,-600 2950,-400 2950,-600
  text "J1" at 275,600 h100
  text "1" at 20,598.59 h50
  text "11" at 530,598.59 h50
  text "21" at 1030,598.59 h50
  text "31" at 1530,598.59 h50
  text "41" at 2025,598.59 h50
  text "51" at 2530,598.59 h50
  text "61" at 3030,598.59 h50
  text "2" at 20,348.59 h50
  text "22" at 1035,348.59 h50
  text "52" at 2535,348.59 h50
  text "12" at 535,343.59 h50
  text "32" at 1535,343.59 h50
  text "42" at 2035,343.59 h50
  text "62" at 3035,343.59 h50
  text "1" at 20,-400 h50
  text "J2" at 290,-400 h100
  text "11" at 530,-400 h50
  text "21" at 1030,-400 h50
  text "31" at 1530,-400 h50
  text "41" at 2025,-400 h50
  text "51" at 2530,-400 h50
  text "61" at 3030,-400 h50
  text "2" at 20,-650 h50
  text "22" at 1035,-650 h50
  text "52" at 2535,-650 h50
  text "12" at 535,-655 h50
  text "32" at 1535,-655 h50
  text "42" at 2035,-655 h50
  text "62" at 3035,-655 h50
Top Solder:
  lines w50: -900,-600 -900,-400 -800,-300 -700,-300 -600,-200 -600,200 -700,300 -850,300 -900,350 -900,650 -850,700 -650,700 -500,850 -500,1000 -400,1100 -200,1100 -200,1200 -700,1700 600,1700 1150,1150 2350,1150 2350,1250 2150,1450 2950,1450 3250,1150 5050,1150 5250,950 5250,850 5200,800 5150,800 5100,750 5400,750 5500,650 5400,550 5100,550 5150,500 5200,500 5250,450 5250,250 5650,250 5900,0 5650,-250 5250,-250 5250,-450 5200,-500 5150,-500 5100,-550 5400,-550 5500,-650 5400,-750 5100,-750 5150,-800 5200,-800 5250,-850 5250,-950 5050,-1150 3250,-1150 2950,-1450 2150,-1450 2350,-1250 2350,-1150 1150,-1150 600,-1700 -700,-1700 -200,-1200 -200,-1100 -400,-1100 -500,-1000 -500,-850 -650,-700 -800,-700 -900,-600
  lines w100: -900,-600 -900,-400 -800,-300 -700,-300 -600,-200 -600,200 -700,300 -850,300 -900,350 -900,650 -850,700 -650,700 -500,850 -500,1000 -400,1100 -200,1100 -200,1200 -700,1700 600,1700 1150,1150 2350,1150 2350,1250 2150,1450 2950,1450 3250,1150 5050,1150 5250,950 5250,850 5200,800 5150,800 5100,750 5400,750 5500,650 5400,550 5100,550 5150,500 5200,500 5250,450 5250,250 5650,250 5900,0 5650,-250 5250,-250 5250,-450 5200,-500 5150,-500 5100,-550 5400,-550 5500,-650 5400,-750 5100,-750 5150,-800 5200,-800 5250,-850 5250,-950 5050,-1150 3250,-1150 2950,-1450 2150,-1450 2350,-1250 2350,-1150 1150,-1150 600,-1700 -700,-1700 -200,-1200 -200,-1100 -400,-1100 -500,-1000 -500,-850 -650,-700 -800,-700 -900,-600
  text "w" at 5058,195 h400 r270
Bottom Solder:
  the board outline again, w100
[8] Board Outline:
  lines w5: -900,-600 -900,-537.5 -900,-412.5 -900,-400 -850,-350 -800,-300 -700,-300 -600,-200 -600,0 -600,200 -700,300 -850,300 -900,350 -900,650 -850,700 -650,700 -500,850 -500,1000 -400,1100 -200,1100 -200,1200 -700,1700 600,1700 1150,1150 2350,1150 2350,1250 2150,1450 2950,1450 3250,1150 5050,1150 5250,950 5250,850 5200,800 5150,800 5100,750 5300,750 5400,750 5500,650 5400,550 5300,550 5100,550 5150,500 5200,500 5250,450 5250,250 5650,250 5900,0 5650,-250 5250,-250 5250,-450 5200,-500 5150,-500 5100,-550 5300,-550 5400,-550 5500,-650 5400,-750 5300,-750 5100,-750 5150,-800 5200,-800 5250,-850 5250,-950 5050,-1150 3250,-1150 2950,-1450 2150,-1450 2350,-1250 2350,-1150 1150,-1150 600,-1700 -700,-1700 -200,-1200 -200,-1100 -400,-1100 -500,-1000 -500,-850 -650,-700 -800,-700 -900,-600
Mechanical 13:
  circle w5: c99,-2276 r21.54
  circle w5: c99,-2375.5 r21.54
  circle w5: c99,-1275.5 r21.54
  circle w5: c99,-1375.5 r21.54
  circle w5: c108,-1080 r62.4
  circle w5: c108,-2570 r62.4
  circle w5: c3508,-2570 r62.5
  circle w5: c3508,-1080 r62.4
  circle w5: c0,-400.14 r21.54
  circle w5: c0,-499.64 r21.54
  circle w5: c0,600.36 r21.54
  circle w5: c0,500.36 r21.54
  circle w5: c9,795.86 r62.4
  circle w5: c9,-694.14 r62.4
  circle w5: c3409,-694.14 r62.5
  circle w5: c3409,795.86 r62.4
  text "1" at -5,583.86 h50
  text "2" at -7.03,483.86 h50
  text "1" at -9,-415.14 h50
  text "2" at -11.03,-515.14 h50
  text "1" at 94,-1292 h50
  text "2" at 91.97,-1392 h50
  text "1" at 90,-2291 h50
  text "2" at 87.97,-2391 h50

## Text inside footprints (layer, text, board x,y; h text height)
J1: Bottom Overlay "1" at -100,600 h100 r180
J2: Bottom Overlay "1" at -100,-400 h100 r180
J5: Top Overlay "1" at 1098.61,759.39 h40 r270